# Altium PCB QuarterRoundPCBv2.PcbDoc
Units mm, origin at the board's own origin, x right, y up, seen from the top; angles counter-clockwise.
Board outline 60 x 60 mm, 2 copper layers (Top Layer, Bottom Layer); 15 components, 21 nets, 180 pads, 3 vias.
Unrouted connection lines stored in the file: 75.
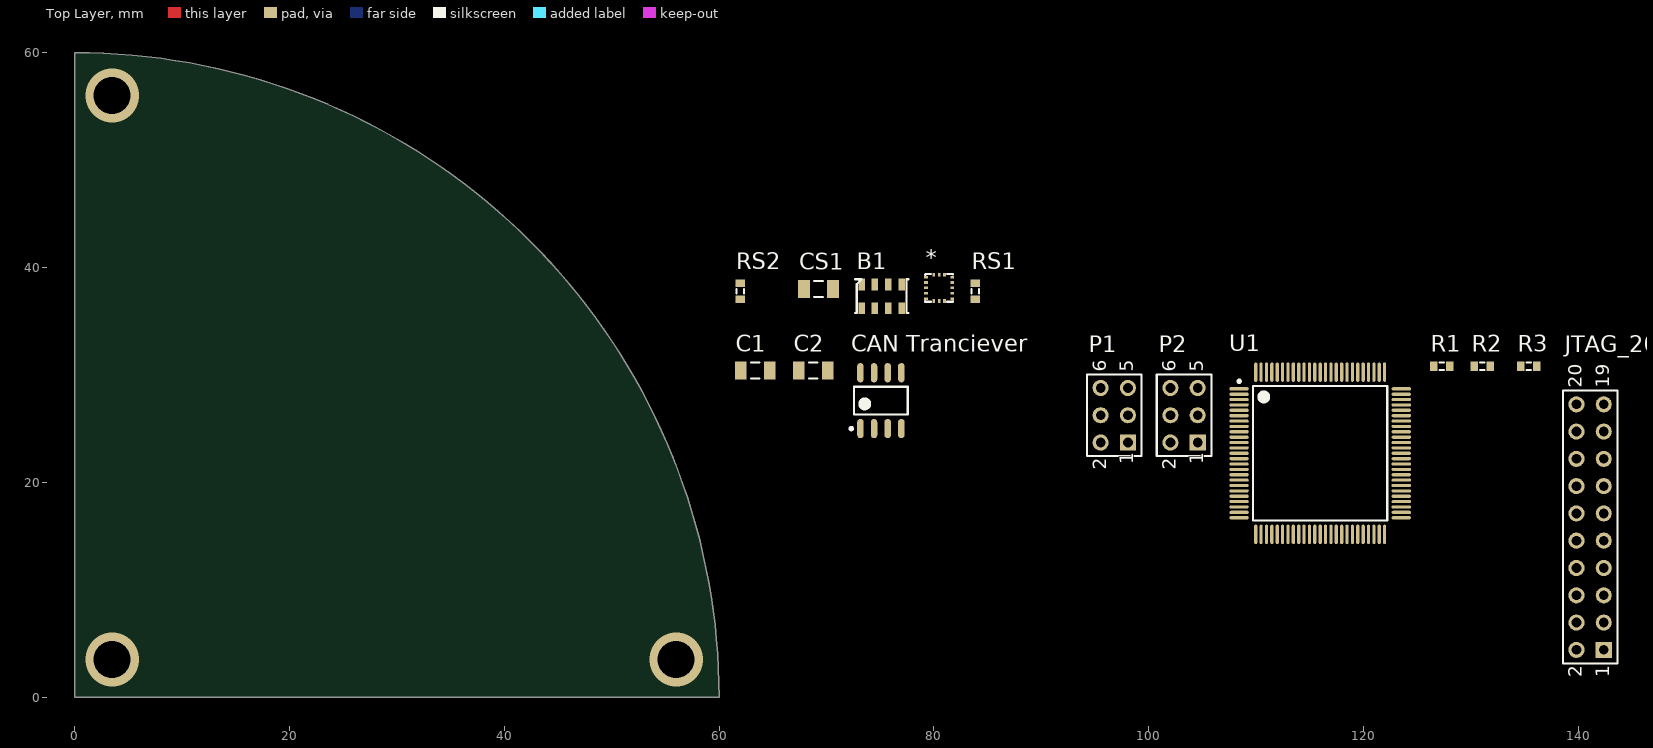
[diagram p0: Top Layer view]
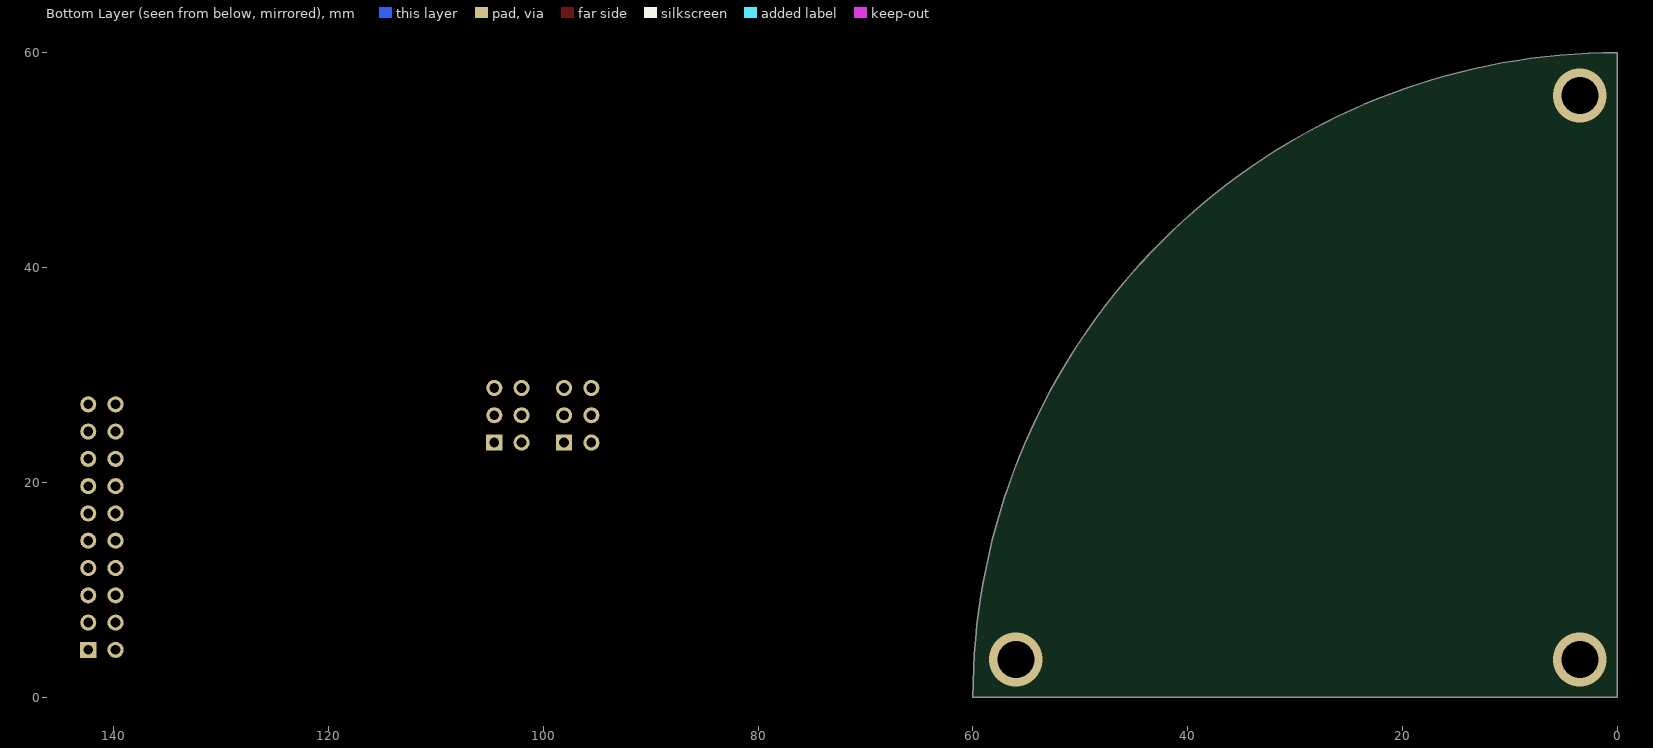
[diagram p1: Bottom Layer view, seen from below]

## Layer stack, top to bottom
Top Solder: solder mask 0.0102, Solder Resist, Dk 3.5
Top Layer: signal copper 0.0356
Dielectric 1: dielectric 0.32, FR-4, Dk 4.8
Bottom Layer: signal copper 0.0356
Bottom Solder: solder mask 0.0102, Solder Resist, Dk 3.5

## Board outline
0,60 cw(c0,0) 60,0 0,0

## Design rules (kind name [scope] priority, off if disabled: settings)
Clearance [All] p1: gap=0.254
PolygonConnect [All] p1: connectstyle=Relief reliefconductorwidth=0.254 reliefentries=4 polygonreliefangle="90 Angle" airgapwidth=0.254
RoomDefinition Sensors [InComponentClass('Sensors')] p1: confinementstyle=ConfineIn formatcopy=TRUE lockcomponents=FALSE outline 61.163,35.398 87.463,35.398 87.463,41.798 61.163,41.798
RoomDefinition apogee_detection_board [InComponentClass('apogee_detection_board')] p2: confinementstyle=ConfineIn formatcopy=TRUE lockcomponents=FALSE outline 61.163,1.498 149.263,1.498 149.263,34.098 61.163,34.098
RoutingVias [All] p1: holewidth=0.711 width=1.27 viastyle="Through Hole" minholewidth=0.711 minwidth=1.27 maxholewidth=0.711 maxwidth=1.27
SolderMaskExpansion [All] p1: expansion=0.102
Width [All] p1: maxlimit=0.254 minlimit=0.254 preferedwidth=0.254
30 further rules are at their usual default settings.

## Classes and differential pairs
component class Sensors: * B1 CS1 RS1 RS2
component class apogee_detection_board: C1 C2 "CAN Tranciever" JTAG_20 P1 P2 R1 R2 R3 U1

## Components (designator, comment, footprint, x,y, rotation, side; value= is the part's Value field where it differs from the comment)
* "LIS331HH Accelerometer" LGA16 79.263,39.098 r0 top
B1 "MS5607-02BA Barometer" "Barometer LCC" 73.263,36.698 r0 top
C1 "Cap Semi" C1206 63.363,30.398 r0 top
C2 "Cap Semi" C1206 68.763,30.398 r0 top
"CAN Tranciever" "TLE8250GVIO" INF-PG-DSO-8-16_N 75.063,27.598 r90 top
CS1 "Cap Semi" C1206 69.263,37.998 r0 top
JTAG_20 "Header 10X2" HDR2X10 142.363,4.398 r90 top
P1 "Header 3X2" HDR2X3 98.063,23.698 r90 top
P2 "Header 3X2" HDR2X3 104.563,23.698 r90 top
R1 "RTCK PD" J1-0603 127.263,30.798 r0 top
R2 "DBGRQ PD" J1-0603 131.063,30.798 r0 top
R3 "DBGACK PD" J1-0603 135.363,30.798 r0 top
RS1 "Res3" J1-0603 83.863,37.798 r90 top
RS2 "Res3" J1-0603 61.963,37.798 r90 top
U1 "STM32F417VET6" STM-LQFP100_N 115.963,22.698 r0 top

## Footprints (in the part's own frame and the unit in brackets; to place one, negate y for a bottom-side part, rotate by r counter-clockwise, add the part's x,y. Pads: shape width x height; smd on the part's side, far side on the other; paste and mask are expansions set on the pad)
"Barometer LCC" [mm]
  rect 0.6x1.1 smd: 1(0,-0.5) 2(1.25,-0.5) 3(2.5,-0.5) 4(3.75,-0.5) 5(3.75,1.7) 6(2.5,1.7) 7(1.25,1.7) 8(0,1.7)
  silkscreen extent -0.6,-0.95 4.35,2.2
C1206 [mm] "Chip Capacitor, Body 3.2x1.6mm, IPC High Density"
  rect 1.1x1.7 smd: 1(-1.35,0) 2(1.35,0)
  silkscreen extent -0.4,-0.75 0.4,0.75, body extent -1.7,-0.9 1.7,0.9, height 1.3
HDR2X3 [mm] "Connector; Header; 3x2 Position"
  rect 1.5x1.5 hole 0.9: 1(0,0)
  round 1.5 hole 0.9: 2(0,2.54) 3(2.54,0) 4(2.54,2.54) 5(5.08,0) 6(5.08,2.54)
  silkscreen extent -1.27,-1.27 6.35,3.81
HDR2X10 [mm] "Connector; Header; 10x2 Position"
  rect 1.5x1.5 hole 0.9: 1(0,0)
  round 1.5 hole 0.9: 2(0,2.54) 3(2.54,0) 4(2.54,2.54) 5(5.08,0) 6(5.08,2.54) 7(7.62,0) 8(7.62,2.54) 9(10.16,0) 10(10.16,2.54) 11(12.7,0) 12(12.7,2.54) 13(15.24,0) 14(15.24,2.54) 15(17.78,0) 16(17.78,2.54) 17(20.32,0) 18(20.32,2.54) 19(22.86,0) 20(22.86,2.54)
  silkscreen extent -1.27,-1.27 24.13,3.81
INF-PG-DSO-8-16_N [mm] "SOP, 8-Leads, Body 4.9x3.9mm, Pitch 1.27mm, IPC Medium Density"
  oval 1.8x0.6 smd: 1(-2.6,1.905) 2(-2.6,0.635) 3(-2.6,-0.635) 4(-2.6,-1.905) 5(2.6,-1.905) 6(2.6,-0.635) 7(2.6,0.635) 8(2.6,1.905)
  silkscreen extent -2.72,-2.5 1.3,2.88, body extent -2,-2.5 2,2.5, height 1.75
J1-0603 [mm] "Chip Resistor, Body 1.6x0.8mm, IPC High Density"
  rect 0.7x0.9 smd: 1(-0.75,0) 2(0.75,0)
  silkscreen extent -0.2,-0.35 0.2,0.35, body extent -0.85,-0.48 0.85,0.48, height 0.9
LGA16 [mm]
  rect 0.35x0.25 smd: 1(0,0) 2(0,-0.5) 3(0,-1) 4(0,-1.5) 5(0,-2) 9(2.45,-2) 10(2.45,-1.5) 11(2.45,-1) 12(2.45,-0.5) 13(2.45,0)
  rect 0.25x0.35 smd: 6(0.725,-2.225) 7(1.225,-2.225) 8(1.725,-2.225) 14(1.725,0.225) 15(1.225,0.225) 16(0.725,0.225)
  silkscreen extent -0.07,-2.3 2.52,0.3
STM-LQFP100_N [mm] "Thin QFP, 100-Leads, Body 14x14mm, Pitch 0.5mm, IPC Medium Density"
  oval 1.8x0.3 smd: 1(-7.55,6) 2(-7.55,5.5) 3(-7.55,5) 4(-7.55,4.5) 5(-7.55,4) 6(-7.55,3.5) 7(-7.55,3) 8(-7.55,2.5) 9(-7.55,2) 10(-7.55,1.5) 11(-7.55,1) 12(-7.55,0.5) 13(-7.55,0) 14(-7.55,-0.5) 15(-7.55,-1) 16(-7.55,-1.5) 17(-7.55,-2) 18(-7.55,-2.5) 19(-7.55,-3) 20(-7.55,-3.5) 21(-7.55,-4) 22(-7.55,-4.5) 23(-7.55,-5) 24(-7.55,-5.5) 25(-7.55,-6) 51(7.55,-6) 52(7.55,-5.5) 53(7.55,-5) 54(7.55,-4.5) 55(7.55,-4) 56(7.55,-3.5) 57(7.55,-3) 58(7.55,-2.5) 59(7.55,-2) 60(7.55,-1.5) 61(7.55,-1) 62(7.55,-0.5) 63(7.55,0) 64(7.55,0.5) 65(7.55,1) 66(7.55,1.5) 67(7.55,2) 68(7.55,2.5) 69(7.55,3) 70(7.55,3.5) 71(7.55,4) 72(7.55,4.5) 73(7.55,5) 74(7.55,5.5) 75(7.55,6)
  oval 0.3x1.8 smd: 26(-6,-7.55) 27(-5.5,-7.55) 28(-5,-7.55) 29(-4.5,-7.55) 30(-4,-7.55) 31(-3.5,-7.55) 32(-3,-7.55) 33(-2.5,-7.55) 34(-2,-7.55) 35(-1.5,-7.55) 36(-1,-7.55) 37(-0.5,-7.55) 38(0,-7.55) 39(0.5,-7.55) 40(1,-7.55) 41(1.5,-7.55) 42(2,-7.55) 43(2.5,-7.55) 44(3,-7.55) 45(3.5,-7.55) 46(4,-7.55) 47(4.5,-7.55) 48(5,-7.55) 49(5.5,-7.55) 50(6,-7.55) 76(6,7.55) 77(5.5,7.55) 78(5,7.55) 79(4.5,7.55) 80(4,7.55) 81(3.5,7.55) 82(3,7.55) 83(2.5,7.55) 84(2,7.55) 85(1.5,7.55) 86(1,7.55) 87(0.5,7.55) 88(0,7.55) 89(-0.5,7.55) 90(-1,7.55) 91(-1.5,7.55) 92(-2,7.55) 93(-2.5,7.55) 94(-3,7.55) 95(-3.5,7.55) 96(-4,7.55) 97(-4.5,7.55) 98(-5,7.55) 99(-5.5,7.55) 100(-6,7.55)
  silkscreen extent -7.67,-6.25 6.25,6.82, body extent -7,-7 7,7, height 1.6

## Part data
C1 C2 CS1: "Capacitor (Semiconductor SIM Model)"
"CAN Tranciever": "High Speed CAN-Transceiver, 1 Mbit/s Transmission Rate, PG-DSO-8-16, Reel, Green"
JTAG_20: "Header, 10-Pin, Dual row"
P1 P2: "Header, 3-Pin, Dual row"
R1 R2 R3: library part Res3, "Resistor"
RS1 RS2: "Resistor"
U1: "ARM Cortex-M4 32-bit MCU+FPU, 210 DMIPS, 512 kB Flash, 192 kB Internal RAM, 82 I/Os, 100-pin LQFP, -40 to 85 degC, Tray"

## Via types
v1: diameter 5, hole 3.45, Top Layer to Bottom Layer, 3 vias

## Nets (pads, with @x,y where several pads share a name; then routed paths per layer and width w, separated by ;. In a path a pad name is that pad's centre, name@x,y a point inside that pad or via, vN(x,y) a via of type N, cw(c..) or ccw(c..) an arc to the next point about the centre after c; other vN are vias at no path point)
3V: *.1 *.8 *.14 *.15 B1.1 CS1.2 RS1.2 RS2.2
"ACT 12V": P1.6 P2.6
CAN_5V: "CAN Tranciever.3" C2.2 P1.4 P2.4
GND: "CAN Tranciever.2" "CAN Tranciever.8" *.5 *.10 *.12 *.13 *.16 B1.3 C1.2 C2.1 CS1.1 JTAG_20.4 JTAG_20.6 JTAG_20.8 JTAG_20.10 JTAG_20.12 JTAG_20.14 JTAG_20.16 JTAG_20.18 JTAG_20.20 P1.3 P2.3 R1.1 R2.1 R3.1 U1.10 U1.20 U1.27 U1.49 U1.74 U1.94 U1.99
Net*_4: *.4 B1.8 RS1.1 U1.92
Net*_6: *.6 B1.7 RS2.1 U1.93
NetC1_1: C1.1 U1.73
"NetCAN Tranciever_1": "CAN Tranciever.1" U1.82
"NetCAN Tranciever_4": "CAN Tranciever.4" U1.81
"NetCAN Tranciever_6": "CAN Tranciever.6" P1.5 P2.5
"NetCAN Tranciever_7": "CAN Tranciever.7" P1.1 P2.1
NetJTAG_20_3: JTAG_20.3 U1.90
NetJTAG_20_5: JTAG_20.5 U1.77
NetJTAG_20_7: JTAG_20.7 U1.72
NetJTAG_20_9: JTAG_20.9 U1.76
NetJTAG_20_11: JTAG_20.11 R1.2
NetJTAG_20_13: JTAG_20.13 U1.89
NetJTAG_20_15: JTAG_20.15 U1.14
NetJTAG_20_17: JTAG_20.17 R2.2
NetJTAG_20_19: JTAG_20.19 R3.2
VCC: JTAG_20.1 JTAG_20.2 P1.2 P2.2 U1.11 U1.19 U1.21 U1.22 U1.28 U1.50 U1.75 U1.100
pads on no net: "CAN Tranciever.5" *.2 *.3 *.7 *.9 *.11 B1.2 B1.4 B1.5 B1.6 U1.1 U1.2 U1.3 U1.4 U1.5 U1.6 U1.7 U1.8 U1.9 U1.12 U1.13 U1.15 U1.16 U1.17 U1.18 U1.23 U1.24 U1.25 U1.26 U1.29 U1.30 U1.31 U1.32 U1.33 U1.34 U1.35 U1.36 U1.37 U1.38 U1.39 U1.40 U1.41 U1.42 U1.43 U1.44 U1.45 U1.46 U1.47 U1.48 U1.51 U1.52 U1.53 U1.54 U1.55 U1.56 U1.57 U1.58 U1.59 U1.60 U1.61 U1.62 U1.63 U1.64 U1.65 U1.66 U1.67 U1.68 U1.69 U1.70 U1.71 U1.78 U1.79 U1.80 U1.83 U1.84 U1.85 U1.86 U1.87 U1.88 U1.91 U1.95 U1.96 U1.97 U1.98
copper on no net:
  other v1: 3.5,3.5 56,3.5 3.5,56

## Text inside footprints (layer, text, board x,y; h text height)
JTAG_20: Top Overlay "20" at 140.331,28.782 h1.27 r90; Top Overlay "19" at 142.871,28.782 h1.27 r90; Top Overlay "1" at 142.871,1.858 h1.27 r90; Top Overlay "2" at 140.331,1.858 h1.27 r90
P1: Top Overlay "6" at 96.031,30.302 h1.27 r90; Top Overlay "5" at 98.571,30.302 h1.27 r90; Top Overlay "2" at 96.031,21.158 h1.27 r90; Top Overlay "1" at 98.571,21.666 h1.27 r90
P2: Top Overlay "6" at 102.531,30.302 h1.27 r90; Top Overlay "5" at 105.071,30.302 h1.27 r90; Top Overlay "2" at 102.531,21.158 h1.27 r90; Top Overlay "1" at 105.071,21.666 h1.27 r90